# EAGLE board InkTime_2D (EAGLE 9.7.0)
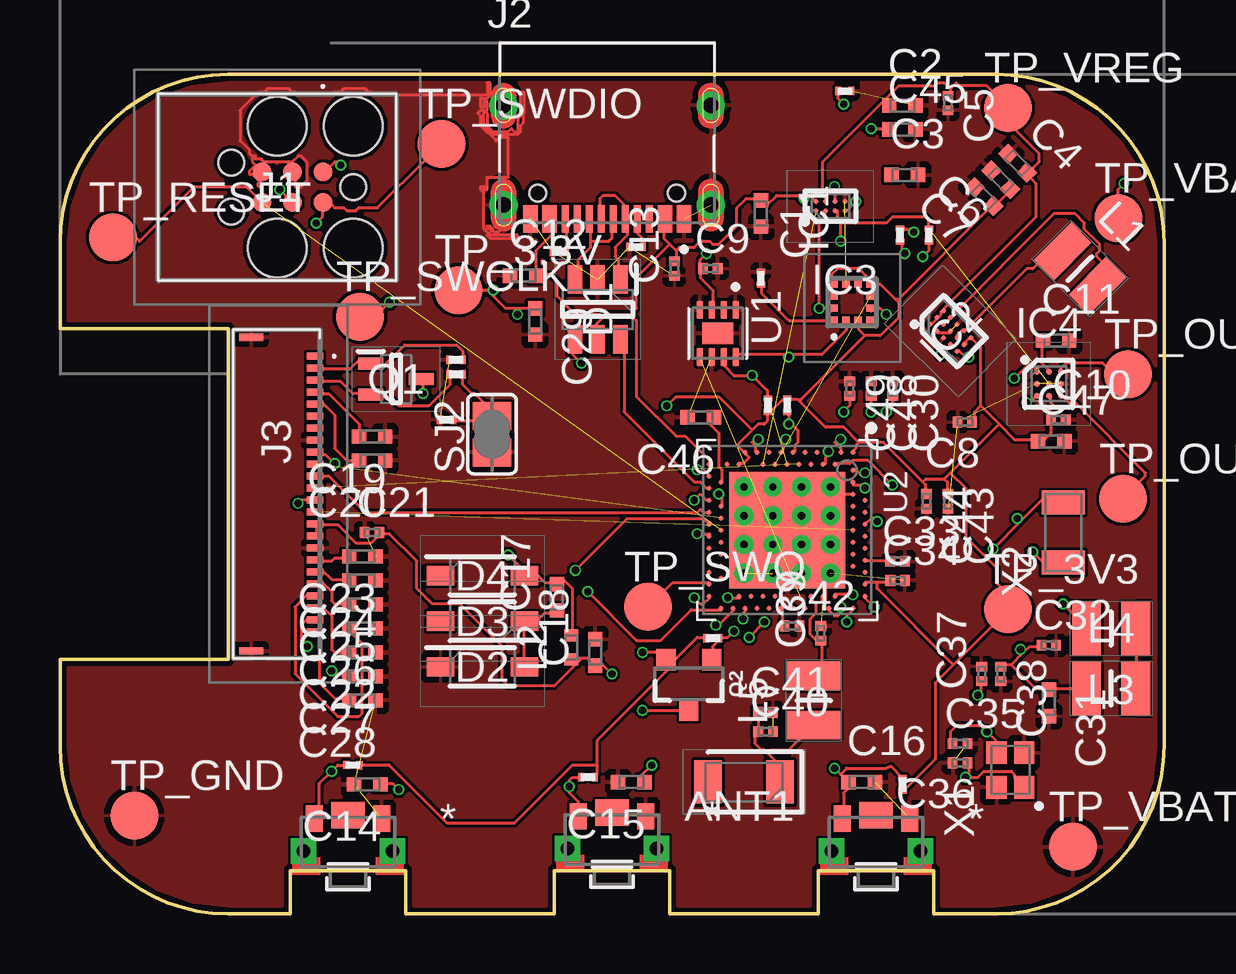
[diagram p0: board, top side]
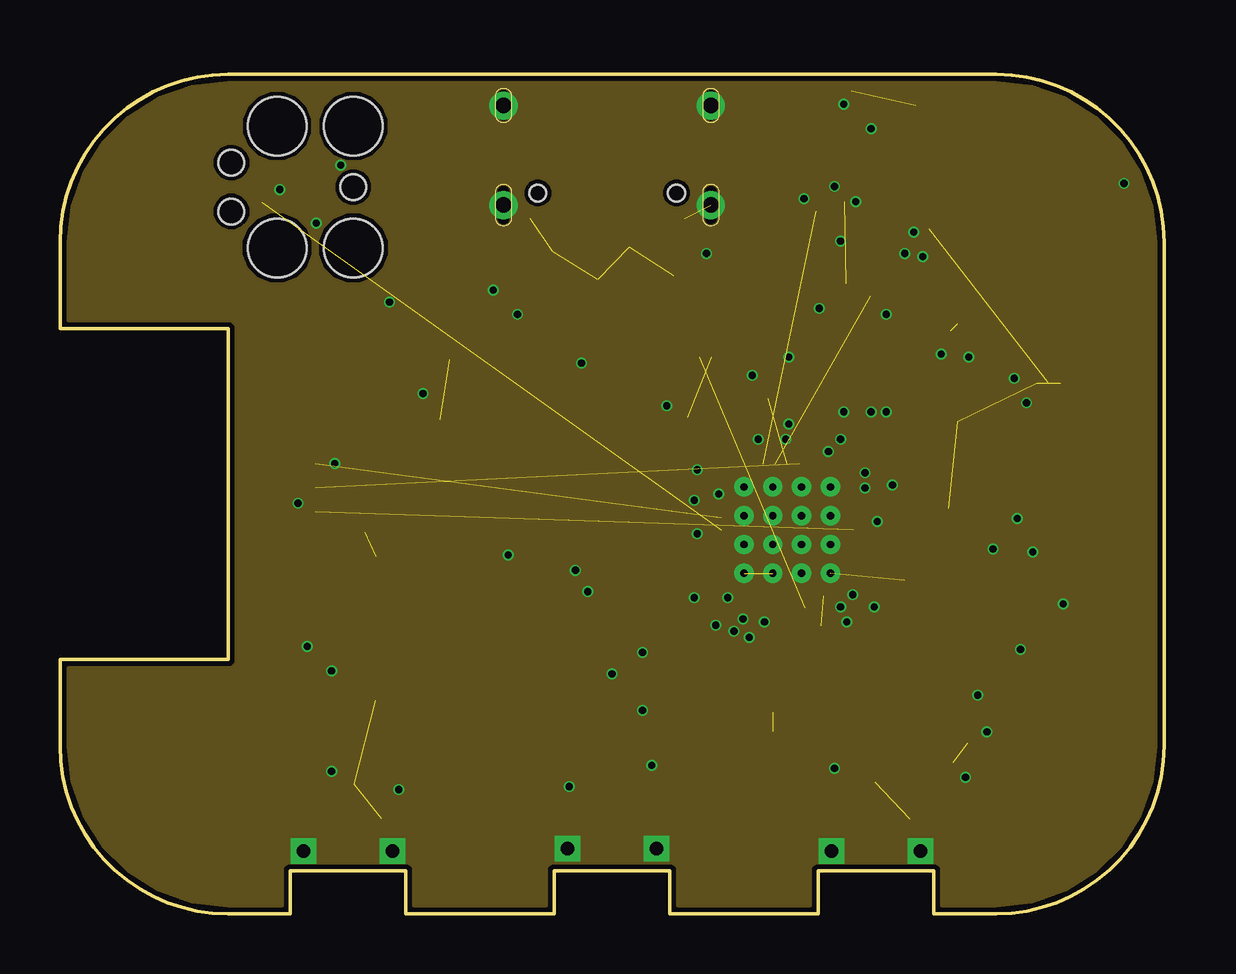
[diagram p1: board, inner layer GND]
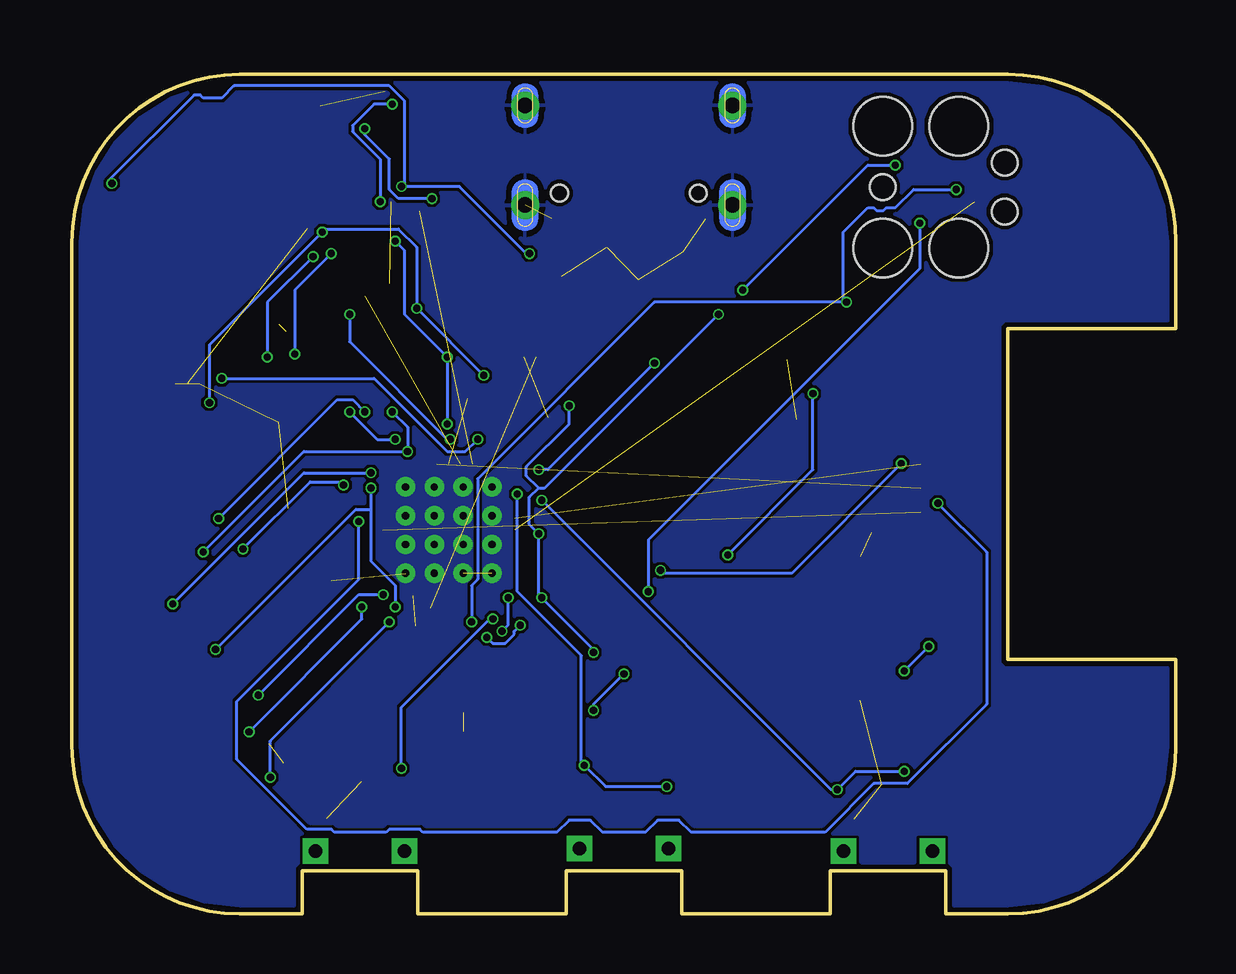
[diagram p2: board, bottom side, seen from below]

Size 46 x 35 mm. Coordinates in mm from the lower left corner, seen from the top.
Outline: 39,0 36.4,0 36.4,1.8 31.6,1.8 31.6,0 25.4,0 25.4,1.8 20.6,1.8 20.6,0 14.4,0 14.4,1.8 9.6,1.8 9.6,0 7,0 arc-90 0,7 0,10.6 7,10.6 7,24.4 0,24.4 0,28 arc-90 7,35 39,35 arc-90 46,28 46,7 arc-90 39,0
Copper layers (1*16): Top / Bottom
Stack-up 2 Layer Stack: Top SilkScreen Epoxy Ink / Top SolderMask SR:Green 0.0254mm Dk 4.3 / Top Surface Finish Lead-Free 0.02mm / Top CuFoil:007 0.035mm / Dielectric-1 Core:084 1.067mm / Bottom CuFoil:007 0.035mm / Bottom Surface Finish Lead-Free 0.02mm / Bottom SolderMask SR:Green 0.0254mm Dk 4.3 / Bottom SilkScreen Epoxy Ink
Design rules: minimum copper width 5mil, minimum drill size 0.2mm, copper clearance wire_polygon to wire_polygon 5mil, copper clearance wire_polygon to pad_smd 5mil, copper clearance wire_polygon to via 5mil, copper clearance pad_smd to pad_smd 5mil, copper clearance pad_smd to via 5mil, copper clearance via to via 5mil, copper clearance smd to pad (same net) 5mil, copper clearance smd to via (same net) 5mil, copper clearance smd to smd (same net) 5mil, dimension clearance 0.2mm, via restrict clearance 0mil, restrict clearance 0mil, drill distance 6mil, keepout clearance 0mil

## Footprints (pad centres in the part's own frame; a part is rotated, then mirrored left to right if it is on the bottom)
2450AT18B100E_ANTC3216X140N = smd 1.15 x 1.8: 1 -1.5,0; 2 1.5,0
NORDIC_NRF_3_RESC0402_N = smd 0.6 x 0.6: 1 -0.55,0; 2 0.55,0
NORDIC_NRF_3_RESC0201_N = smd 0.4 x 0.45: 1 -0.305,0; 2 0.305,0
ESP32_C6_LIBRARY_3_SOT95P280X145-6N = smd 1.2 x 0.6: 1 -1.25,0.95; 2 -1.25,0; 3 -1.25,-0.95; 4 1.25,-0.95; 5 1.25,0; 6 1.25,0.95
ESP32_C6_LIBRARY_5_SOD3716X135N = smd 1.15 x 0.8: 1 -1.75,0; 2 1.75,0
BQ25180YBGR_BGA8C40P2X4_100X155X50 = smd 0.2 x 0.2: A1 -0.2,0.6; A2 0.2,0.6; B1 -0.2,0.2; B2 0.2,0.2; C1 -0.2,-0.2; C2 0.2,-0.2; D1 -0.2,-0.6; D2 0.2,-0.6
RT6160AWSC_BGA15C40P3X5_140X230X60 = smd 0.216 x 0.216: A1 -0.4,0.8; A2 0,0.8; A3 0.4,0.8; B1 -0.4,0.4; B2 0,0.4; B3 0.4,0.4; C1 -0.4,0; C2 0,0; C3 0.4,0; D1 -0.4,-0.4; D2 0,-0.4; D3 0.4,-0.4; E1 -0.4,-0.8; E2 0,-0.8; E3 0.4,-0.8
BMA423_BMA423 = smd 0.3 x 0.35: 1 -0.75,-0.775; 2 -0.25,-0.775; 3 0.25,-0.775; 4 0.75,-0.775; 7 0.75,0.775; 8 0.25,0.775; 9 -0.25,0.775; 10 -0.75,0.775 | smd 0.35 x 0.3: 5 0.775,-0.25; 6 0.775,0.25; 11 -0.775,0.25; 12 -0.775,-0.25
DRV2605YZFR_BGA9C50P3X3_144X144X62 = smd 0.25 x 0.25: A1 -0.5,0.5; A2 0,0.5; A3 0.5,0.5; B1 -0.5,0; B2 0,0; B3 0.5,0; C1 -0.5,-0.5; C2 0,-0.5; C3 0.5,-0.5
TC2030-IDC_TC2030IDC = smd 0.783 x 0.783: 1 -0.953,-0.635; 2 -0.953,0.635; 3 0.317,-0.635; 4 0.317,0.635; 5 1.588,-0.635; 6 1.588,0.635 | hole 2.451: -2.223,-2.54; -2.223,2.54; 0.952,-2.54; 0.952,2.54 | hole 1.067: -2.223,0; 2.857,-1.016; 2.857,1.016
KH-TYPE-C-16P_KINGHELM_KH-TYPE-C-16P = smd 0.6 x 1.15: A1_B12 -3.2,4.725; A4_B9 -2.4,4.725; A9_B4 2.4,4.725; A12_B1 3.2,4.725 | smd 0.3 x 1.15: A5 -1.25,4.725; A6 -0.25,4.725; A7 0.25,4.725; A8 1.25,4.725; B5 1.75,4.725; B6 0.75,4.725; B7 -0.75,4.725; B8 -1.75,4.725 | drill 0.65 pad 1.05: SH1 -4.32,0; SH2 4.32,0; SH3 -4.32,4.15; SH4 4.32,4.15 | hole 0.7: -2.89,3.65; 2.89,3.65
503480-2400_5034802400 = smd 0.3 x 0.7: 1 -5.75,1.525; 2 -5.25,1.525; 3 -4.75,1.525; 4 -4.25,1.525; 5 -3.75,1.525; 6 -3.25,1.525; 7 -2.75,1.525; 8 -2.25,1.525; 9 -1.75,1.525; 10 -1.25,1.525; 11 -0.75,1.525; 12 -0.25,1.525; 13 0.25,1.525; 14 0.75,1.525; 15 1.25,1.525; 16 1.75,1.525; 17 2.25,1.525; 18 2.75,1.525; 19 3.25,1.525; 20 3.75,1.525; 21 4.25,1.525; 22 4.75,1.525; 23 5.25,1.525; 24 5.75,1.525 | smd 0.3 x 1: MP1 -6.54,-1.125; MP2 6.54,-1.125
MLP2016SR47MT0S1_INDC2016X100N = smd 1.2 x 2.2: 1 -1.028,0; 2 1.028,0
NORDIC_NRF_2_RESC0402_L = smd 0.5 x 0.6: 1 -0.5,0; 2 0.5,0
ESP32_C6_LIBRARY_6_SOT65P210X110-3N = smd 1.05 x 0.5: 1 -1.05,0.65; 2 -1.05,-0.65; 3 1.05,0
ESP32_C6_LIBRARY_4_ESP32_C6_LIBRARY_4_ESP32_C6_LIBRARY_4_ESP32_C6_LIBRARY_4_ESP32_WROVER_SPARKFUN-DISCRETESEMI_SOT23-3 = smd 0.8 x 0.9: 1 -0.95,-1; 2 0.95,-1; 3 0,1.1
CPF0201D7K68C1_0201 = smd 0.35 x 0.25: 1 0,0.275; 2 0,-0.275
ESP32_C6_LIBRARY_7_JUMPER_SJ = smd 1.168 x 1.6: 1 -0.762,0; 2 0.762,0
2025-10-22_07-23-44_LIBRARY_SW_EVP-AKE31A_PAN = smd 0.711 x 1.092: 1 -1.4,-0.972; 2 1.4,-0.972 | drill 0.559 pad 0.914 square: 3 -1.848,0.381; 4 1.848,0.381 | smd 1.397 x 1.092: 5 0,-1.124
HECTOR_WATCH_1_TP20R = smd 2 x 2: TP 0,0
ESP32_C6_LIBRARY_SON50P200X200X80-9N = smd 0.76 x 0.27: 1 -0.985,0.75; 2 -0.985,0.25; 3 -0.985,-0.25; 4 -0.985,-0.75; 5 0.985,-0.75; 6 0.985,-0.25; 7 0.985,0.25; 8 0.985,0.75 | smd 0.9 x 1.3: 9 0,0
NORDIC_NRF_4_AQFN50P700X700X85_HS-74N = smd 4.85 x 4.85: P$74 0,0 | drill 0.3 pad 0.6: P$75 -1.8,1.8; P$76 -0.6,1.8; P$77 0.6,1.8; P$78 1.8,1.8; P$79 -1.8,0.6; P$80 -0.6,0.6; P$81 0.6,0.6; P$82 1.8,0.6; P$83 -1.8,-0.6; P$84 -0.6,-0.6; P$85 0.6,-0.6; P$86 1.8,-0.6; P$87 -1.8,-1.8; P$88 -0.6,-1.8; P$89 0.6,-1.8; P$90 1.8,-1.8 | smd 0.2 x 0.2: P$A8 -1.25,3.25; P$A10 -0.75,3.25; P$A12 -0.25,3.25; P$A14 0.25,3.25; P$A16 0.75,3.25; P$A18 1.25,3.25; P$A20 1.75,3.25; P$A22 2.25,3.25; P$A23 2.75,3.25; P$AA24 3.25,-2.25; P$AB2 -2.75,-2.5; P$AC5 -2,-2.75; P$AC9 -1,-2.75; P$AC11 -0.5,-2.75; P$AC13 0,-2.75; P$AC15 0.5,-2.75; P$AC17 1,-2.75; P$AC19 1.5,-2.75; P$AC21 2,-2.75; P$AC24 3.25,-2.75; P$AD2 -2.75,-3.25; P$AD4 -2.25,-3.25; P$AD6 -1.75,-3.25; P$AD8 -1.25,-3.25; P$AD10 -0.75,-3.25; P$AD12 -0.25,-3.25; P$AD14 0.25,-3.25; P$AD16 0.75,-3.25; P$AD18 1.25,-3.25; P$AD20 1.75,-3.25; P$AD22 2.25,-3.25; P$AD23 2.75,-3.25; P$B1 -3.25,2.75; P$B3 -2.5,2.75; P$B5 -2,2.75; P$B7 -1.5,2.75; P$B9 -1,2.75; P$B11 -0.5,2.75; P$B13 0,2.75; P$B15 0.5,2.75; P$B17 1,2.75; P$B19 1.5,2.75; P$B24 3.25,2.75; P$C1 -3.25,2.25; P$D2 -2.75,2; P$D23 2.75,2; P$E24 3.25,1.75; P$F2 -2.75,1.5; P$F23 2.75,1.5; P$G1 -3.25,1.25; P$H2 -2.75,1; P$H23 2.75,1; P$J1 -3.25,0.75; P$J24 3.25,0.75; P$K2 -2.75,0.5; P$L1 -3.25,0.25; P$L24 3.25,0.25; P$M2 -2.75,0; P$N1 -3.25,-0.25; P$N24 3.25,-0.25; P$P2 -2.75,-0.5; P$P23 2.75,-0.5; P$R1 -3.25,-0.75; P$R24 3.25,-0.75; P$T2 -2.75,-1; P$T23 2.75,-1; P$U1 -3.25,-1.25; P$U24 3.25,-1.25; P$V23 2.75,-1.5; P$W1 -3.25,-1.75; P$W24 3.25,-1.75; P$Y2 -2.75,-2; P$Y23 2.75,-2
NORDIC_NRF_BT-XTAL_2016_N = smd 0.95 x 0.85: 1 -0.725,-0.575; 2 0.725,-0.575; 3 0.725,0.575; 4 -0.725,0.575
NORDIC_NRF_1_XTAL_3215_N = smd 1 x 1.8: 1 -1.25,0; 2 1.25,0

## Placement (x,y rotation side)
ANT1  2450AT18B100E  [2450AT18B100E_ANTC3216X140N]  28.5,5.5 180 top
C1  1uF  [NORDIC_NRF_3_RESC0402_N]  29.2,29.2 270 top
C2  10uF  [NORDIC_NRF_3_RESC0402_N]  35.1,33.7 0 top
C3  1uF  [NORDIC_NRF_3_RESC0402_N]  35.2,30.8 0 top
C4  10uF  [NORDIC_NRF_3_RESC0402_N]  39.9,31.3 315 top
C5  0.1uF  [NORDIC_NRF_3_RESC0201_N]  37,33.8 270 top
C6  22uF  [NORDIC_NRF_3_RESC0402_N]  39.2,30.6 135 top
C7  22uF  [NORDIC_NRF_3_RESC0402_N]  38.5,29.9 135 top
C8  0.1uF  [NORDIC_NRF_3_RESC0201_N]  37.7,20.5 180 top
C9  0.1uF  [NORDIC_NRF_3_RESC0201_N]  27.1,26.9 0 top
C10  0.1uF  [NORDIC_NRF_3_RESC0201_N]  41.6,20.6 0 top
C11  1uF  [NORDIC_NRF_3_RESC0402_N]  41.5,23.9 0 top
C12  4.7uF  [NORDIC_NRF_3_RESC0402_N]  19.3,26.6 0 top
C13  0.1uF  [NORDIC_NRF_3_RESC0201_N]  25.6,26.9 90 top
C14  1uF  [NORDIC_NRF_3_RESC0402_N]  12.8,5.4 180 top
C15  1uF  [NORDIC_NRF_3_RESC0402_N]  23.8,5.5 180 top
C16  1uF  [NORDIC_NRF_3_RESC0402_N]  33.4,5.5 0 top
C17  4.7uF/25V  [NORDIC_NRF_3_RESC0402_N]  20.7,13.2 90 top
C18  10uF  [NORDIC_NRF_3_RESC0402_N]  22.3,10.9 90 top
C19  1uF  [NORDIC_NRF_3_RESC0402_N]  13,19.9 180 top
C20  1uF  [NORDIC_NRF_3_RESC0402_N]  13,18.9 180 top
C21  0.1uF  [NORDIC_NRF_3_RESC0201_N]  13,15.9 359.8 top
C22  1uF  [NORDIC_NRF_3_RESC0402_N]  12.6,10.9 180 top
C23  1uF  [NORDIC_NRF_3_RESC0402_N]  12.6,14.9 180 top
C24  1uF  [NORDIC_NRF_3_RESC0402_N]  12.6,13.9 180 top
C25  1uF  [NORDIC_NRF_3_RESC0402_N]  12.6,12.9 180 top
C26  1uF  [NORDIC_NRF_3_RESC0402_N]  12.6,11.9 180 top
C27  1uF  [NORDIC_NRF_3_RESC0402_N]  12.6,9.9 180 top
C28  1uF  [NORDIC_NRF_3_RESC0402_N]  12.6,8.9 180 top
C29  4.7uF  [NORDIC_NRF_3_RESC0402_N]  19.8,24.7 270 top
C30  0.1uF  [NORDIC_NRF_3_RESC0201_N]  34.7,21.9 270 top
C31  1uF  [NORDIC_NRF_3_RESC0402_N]  41.2,8.8 270 top
C32  47nF  [NORDIC_NRF_3_RESC0201_N]  41.2,11.2 0 top
C33  NC  [NORDIC_NRF_3_RESC0201_N]  34.9,14.7 0 top
C34  0.1uF  [NORDIC_NRF_3_RESC0201_N]  34.9,13.9 0 top
C35  12pF  [NORDIC_NRF_3_RESC0201_N]  37.5,7.1 0 top
C36  12pF  [NORDIC_NRF_3_RESC0201_N]  37.5,6.3 180 top
C37  100pF  [NORDIC_NRF_3_RESC0201_N]  38.4,10 90 top
C38  NC  [NORDIC_NRF_3_RESC0201_N]  39.2,10 270 top
C39  1pF  [NORDIC_NRF_3_RESC0201_N]  31.7,11.7 90 top
C40  1pF  [NORDIC_NRF_3_RESC0201_N]  29.4,7.6 0 top
C41  NC  [NORDIC_NRF_3_RESC0201_N]  29.4,8.4 0 top
C42  820pF/NC  [NORDIC_NRF_3_RESC0201_N]  30.5,12 0 top
C43  0.1uF  [NORDIC_NRF_3_RESC0201_N]  37,17.2 270 top
C44  0.1uF  [NORDIC_NRF_3_RESC0201_N]  36.1,17.2 270 top
C45  4.7uF  [NORDIC_NRF_3_RESC0402_N]  35.1,32.7 0 top
C46  4.7uF  [NORDIC_NRF_3_RESC0402_N]  26.7,20.7 180 top
C47  4.7uF  [NORDIC_NRF_3_RESC0402_N]  41.3,19.7 0 top
C48  12pF  [NORDIC_NRF_3_RESC0201_N]  33.8,21.9 270 top
C49  12pF  [NORDIC_NRF_3_RESC0201_N]  32.9,21.9 270 top
D1  USBLC6-2SC6Y  [ESP32_C6_LIBRARY_3_SOT95P280X145-6N]  22.4,25.2 270 top
D2  MBR0530  [ESP32_C6_LIBRARY_5_SOD3716X135N]  17.6,10.3 0 top
D3  MBR0530  [ESP32_C6_LIBRARY_5_SOD3716X135N]  17.6,12.2 180 top
D4  MBR0530  [ESP32_C6_LIBRARY_5_SOD3716X135N]  17.6,14.1 0 top
IC1  BQ25180YBGR  [BQ25180YBGR_BGA8C40P2X4_100X155X50]  32.1,29.5 90 top
IC2  RT6160AWSC  [RT6160AWSC_BGA15C40P3X5_140X230X60]  37.1,24.3 45 top
IC3  BMA423  [BMA423_BMA423]  33,25.5 0 top
IC4  DRV2605YZFR  [DRV2605YZFR_BGA9C50P3X3_144X144X62]  41.2,22.1 0 top
J1  TC2030-IDC  [TC2030-IDC_TC2030IDC]  10,30.3 180 top
J2  KH-TYPE-C-16P_KH-TYPE-C-16P  [KH-TYPE-C-16P_KINGHELM_KH-TYPE-C-16P]  22.8,33.7 180 top
J3  503480-2400  [503480-2400_5034802400]  9.1,17.5 270 top
L1  FTC252012SR47MBCA  [MLP2016SR47MT0S1_INDC2016X100N]  42.5,26.9 135 top
L2  68uH  [NORDIC_NRF_2_RESC0402_L]  21.3,11.1 90 top
L3  10uH  [MLP2016SR47MT0S1_INDC2016X100N]  43.8,11.9 0 top
L4  15uH  [MLP2016SR47MT0S1_INDC2016X100N]  43.8,9.4 180 top
L5  3.9nH  [MLP2016SR47MT0S1_INDC2016X100N]  31.4,8.9 270 top
Q1  SI1308EDL-T1-GE3  [ESP32_C6_LIBRARY_6_SOT65P210X110-3N]  14,22.3 0 top
Q2  20V/4.2A/52mΩ/1.4W  [ESP32_C6_LIBRARY_4_ESP32_C6_LIBRARY_4_ESP32_C6_LIBRARY_4_ESP32_C6_LIBRARY_4_ESP32_WROVER_SPARKFUN-DISCRETESEMI_SOT23-3]  26.2,9.6 180 top
R1  10k  [CPF0201D7K68C1_0201]  32.7,34.3 270 top
R2  0  [CPF0201D7K68C1_0201]  35,28.3 180 top
R3  0  [CPF0201D7K68C1_0201]  36.2,28.3 180 top
R4  3k3  [CPF0201D7K68C1_0201]  29.5,21.2 180 top
R5  3k3  [CPF0201D7K68C1_0201]  30.3,21.2 0 top
R6  0  [CPF0201D7K68C1_0201]  29.2,26.5 180 top
R7  5k1  [CPF0201D7K68C1_0201]  24,27.8 90 top
R8  5k1  [CPF0201D7K68C1_0201]  20.8,27.6 270 top
R9  10k  [CPF0201D7K68C1_0201]  12.2,6.2 88.1 top
R10  10k  [CPF0201D7K68C1_0201]  22,5.7 90 top
R11  10k  [CPF0201D7K68C1_0201]  35.1,5.4 0 top
R12  10k  [CPF0201D7K68C1_0201]  16.5,23.1 90 top
R13  0.47  [CPF0201D7K68C1_0201]  16.5,22.5 270 top
R14  2.2  [CPF0201D7K68C1_0201]  16.1,20.6 90 top
R15  10k  [CPF0201D7K68C1_0201]  27.2,11.5 270 top
SJ2  [ESP32_C6_LIBRARY_7_JUMPER_SJ]  18,20 90 top
SW_DN  2025-10-22_07-23-44_LIBRARY_EVP-AKE31ASW_EVP-AKE31A_PAN  [2025-10-22_07-23-44_LIBRARY_SW_EVP-AKE31A_PAN]  34,3 180 top
SW_ENT  2025-10-22_07-23-44_LIBRARY_EVP-AKE31ASW_EVP-AKE31A_PAN  [2025-10-22_07-23-44_LIBRARY_SW_EVP-AKE31A_PAN]  23,3.1 180 top
SW_UP  2025-10-22_07-23-44_LIBRARY_EVP-AKE31ASW_EVP-AKE31A_PAN  [2025-10-22_07-23-44_LIBRARY_SW_EVP-AKE31A_PAN]  12,3 180 top
TP_3.3V  HECTOR_WATCH_1_TPTP20R  [HECTOR_WATCH_1_TP20R]  16.6,26 0 top
TP_3V3  HECTOR_WATCH_1_TPTP20R  [HECTOR_WATCH_1_TP20R]  39.5,12.7 0 top
TP_GND  HECTOR_WATCH_1_TPTP20R  [HECTOR_WATCH_1_TP20R]  3.1,4.1 0 top
TP_OUT+  HECTOR_WATCH_1_TPTP20R  [HECTOR_WATCH_1_TP20R]  44.5,22.5 0 top
TP_OUT-  HECTOR_WATCH_1_TPTP20R  [HECTOR_WATCH_1_TP20R]  44.3,17.3 0 top
TP_RESET  HECTOR_WATCH_1_TPTP20R  [HECTOR_WATCH_1_TP20R]  2.2,28.2 0 top
TP_SWCLK  HECTOR_WATCH_1_TPTP20R  [HECTOR_WATCH_1_TP20R]  12.5,24.9 0 top
TP_SWDIO  HECTOR_WATCH_1_TPTP20R  [HECTOR_WATCH_1_TP20R]  15.9,32.1 0 top
TP_SWO  HECTOR_WATCH_1_TPTP20R  [HECTOR_WATCH_1_TP20R]  24.5,12.8 0 top
TP_VBAT  HECTOR_WATCH_1_TPTP20R  [HECTOR_WATCH_1_TP20R]  44.1,29 0 top
TP_VBAT_GND  HECTOR_WATCH_1_TPTP20R  [HECTOR_WATCH_1_TP20R]  42.2,2.8 0 top
TP_VREG  HECTOR_WATCH_1_TPTP20R  [HECTOR_WATCH_1_TP20R]  39.5,33.6 0 top
U1  MAX17048G+T10  [ESP32_C6_LIBRARY_SON50P200X200X80-9N]  27.4,24.2 270 top
U2  NRF52840_QF  [NORDIC_NRF_4_AQFN50P700X700X85_HS-74N]  30.3,16 270 top
X1  32Mhz  [NORDIC_NRF_BT-XTAL_2016_N]  39.6,6 90 top
X2  32.768kHz  [NORDIC_NRF_1_XTAL_3215_N]  41.8,15.9 90 top

## Library data of the parts
ANT1 = InkTime_v5; ARROW_PART_NUMBER: 2450AT18B100E; ARROW_PRICE-STOCK: https://www.arrow.com/en/products/2450at18b100e/johanson-dielectrics?utm_currency=USD&region=nac; DESCRIPTION: Antennas 2.45GHz ANTENNA; HEIGHT: 1.4mm; MANUFACTURER_NAME: JOHANSON TECHNOLOGY; MANUFACTURER_PART_NUMBER: 2450AT18B100E; MOUSER_PART_NUMBER: 609-2450AT18B100E; MOUSER_PRICE-STOCK: https://www.mouser.co.uk/ProductDetail/Johanson-Technology/2450AT18B100E?qs=yCnrNFeXz%252Bh5MFsFIXGZGA%3D%3D
C1-C49 L2 R1-R15 SJ2 TP_3.3V TP_3V3 TP_GND TP_OUT+ TP_OUT- TP_RESET TP_SWCLK TP_SWDIO TP_SWO TP_VBAT TP_VBAT_GND TP_VREG U2 X1 X2 = InkTime_v5
D1 = InkTime_v5; AVAILABILITY: In Stock; CHECK_PRICES: https://www.snapeda.com/parts/USBLC6-2SC6Y/STMicroelectronics/view-part/?ref=eda; DESCRIPTION: 17V Clamp 5A (8/20µs) Ipp Tvs Diode Surface Mount SOT-23-6; MF: STMicroelectronics; MP: USBLC6-2SC6Y; PACKAGE: SOT-23-6 STMicroelectronics; PRICE: None; SNAPEDA_LINK: https://www.snapeda.com/parts/USBLC6-2SC6Y/STMicroelectronics/view-part/?ref=snap
D2-D4 = InkTime_v5; AVAILABILITY: In Stock; CHECK_PRICES: https://www.snapeda.com/parts/MBR0530/Onsemi/view-part/?ref=eda; DESCRIPTION: Diode Schottky 30 V 500mA Surface Mount SOD-123; MF: ON Semiconductor; MP: MBR0530; PACKAGE: SOD-123-2 ON Semiconductor; PRICE: None; PURCHASE-URL: https://www.snapeda.com/api/url_track_click_mouser/?unipart_id=179458&manufacturer=ON Semiconductor&part_name=MBR0530&search_term=None; SNAPEDA_LINK: https://www.snapeda.com/parts/MBR0530/Onsemi/view-part/?ref=snap
IC1 = InkTime_v5; ARROW_PART_NUMBER: BQ25180YBGR; ARROW_PRICE-STOCK: https://www.arrow.com/en/products/bq25180ybgr/texas-instruments?utm_currency=USD&region=nac; DESCRIPTION: Charger IC Lithium Ion/Polymer, Lithium Iron Phosphate 8-DSBGA (1.6x1.1); HEIGHT: 0.5mm; MANUFACTURER_NAME: Texas Instruments; MANUFACTURER_PART_NUMBER: BQ25180YBGR; MOUSER_PART_NUMBER: 595-BQ25180YBGR; MOUSER_PRICE-STOCK: https://www.mouser.co.uk/ProductDetail/Texas-Instruments/BQ25180YBGR?qs=doiCPypUmgEWjAK%252BJAX6Tw%3D%3D
IC2 = InkTime_v5; DESCRIPTION: Buck-Boost Regulator Positive Output Step-Up/Step-Down I2C DC-DC Controller IC 15-WL-CSP (BSC) (1.4x2.3); HEIGHT: 0.6mm; MANUFACTURER_NAME: RICHTEK; MANUFACTURER_PART_NUMBER: RT6160AWSC; MOUSER_PART_NUMBER: 835-RT6160AWSC; MOUSER_PRICE-STOCK: https://www.mouser.co.uk/ProductDetail/Richtek/RT6160AWSC?qs=amGC7iS6iy%2FLd9PSoixZXQ%3D%3D
IC3 = InkTime_v5; ARROW_PART_NUMBER: BMA423; ARROW_PRICE-STOCK: https://www.arrow.com/en/products/bma423/bosch; DESCRIPTION: Accelerometers Triaxial low-g 12bit Acceleration Sensor; HEIGHT: 1mm; MANUFACTURER_NAME: BOSCH; MANUFACTURER_PART_NUMBER: BMA423; MOUSER_PART_NUMBER: 262-BMA423; MOUSER_PRICE-STOCK: https://www.mouser.co.uk/ProductDetail/Bosch-Sensortec/BMA423?qs=HXFqYaX1Q2xC%252BSgeGoX3mg%3D%3D
IC4 = InkTime_v5; ARROW_PART_NUMBER: DRV2605YZFR; ARROW_PRICE-STOCK: https://www.arrow.com/en/products/drv2605yzfr/texas-instruments?region=nac; DESCRIPTION: Haptic Driver for ERM/LRA with Built-In Library and Smart Loop Architecture; HEIGHT: 0.625mm; MANUFACTURER_NAME: Texas Instruments; MANUFACTURER_PART_NUMBER: DRV2605YZFR
J1 = InkTime_v5; DESCRIPTION: CABLE ADAPTER 6 POS; HEIGHT: 19mm; MANUFACTURER_NAME: Tag Connect; MANUFACTURER_PART_NUMBER: TC2030-IDC
J2 = InkTime_v5; AVAILABILITY: Not in stock; CHECK_PRICES: https://www.snapeda.com/parts/KH-TYPE-C-16P/Kinghelm/view-part/?ref=eda; MF: kinghelm; MP: KH-TYPE-C-16P; PACKAGE: None; PRICE: None; SNAPEDA_LINK: https://www.snapeda.com/parts/KH-TYPE-C-16P/Kinghelm/view-part/?ref=snap
J3 = InkTime_v5; DESCRIPTION: FFC & FPC Connectors 0.5mm FPC RA SMT Dual Contact 24Ckt; HEIGHT: 1.87mm; MANUFACTURER_NAME: Molex; MANUFACTURER_PART_NUMBER: 503480-2400; MOUSER_PART_NUMBER: 538-503480-2400; MOUSER_PRICE-STOCK: https://www.mouser.co.uk/ProductDetail/Molex/503480-2400?qs=OAhjpuo3Vu7efIoxFh9AOw%3D%3D
L1 L3-L5 = InkTime_v5; DESCRIPTION: SMD / SMT Inductors (Coils), L=0.47?H, L x W x T :; HEIGHT: 1mm; JLCPCB: https://jlcpcb.com/partdetail/6763488-FTC252012SR47MBCA/C5832368; MANUFACTURER_NAME: TDK; MANUFACTURER_PART_NUMBER: FTC252012SR47MBCA
Q1 = InkTime_v5; AVAILABILITY: In Stock; CHECK_PRICES: https://www.snapeda.com/parts/SI1308EDL-T1-GE3/Vishay+Siliconix/view-part/?ref=eda; DESCRIPTION: Si1308EDL-T1-GE3 N-channel MOSFET Transistor, 1.5 A, 30 V, 3-Pin SC-70 | Siliconix / Vishay SI1308EDL-T1-GE3; MF: Vishay Siliconix; MP: SI1308EDL-T1-GE3; PACKAGE: SOT-323 Vishay Semiconductor; PRICE: None; PURCHASE-URL: https://www.snapeda.com/api/url_track_click_mouser/?unipart_id=274603&manufacturer=Vishay Siliconix&part_name=SI1308EDL-T1-GE3&search_term=None; SNAPEDA_LINK: https://www.snapeda.com/parts/SI1308EDL-T1-GE3/Vishay+Siliconix/view-part/?ref=snap
Q2 = InkTime_v5; PROD_ID: TRAN-14388
SW_DN SW_ENT SW_UP = InkTime_v5; COPYRIGHT: Copyright (C) 2025 Ultra Librarian. All rights reserved.; DIGI-KEY_PART_NUMBER_1: P123437TR-ND; DIGI-KEY_PART_NUMBER_2: P123437CT-ND; DIGI-KEY_PART_NUMBER_3: P123437DKR-ND; MANUFACTURER_NAME: Panasonic; MANUFACTURER_PART_NUMBER: EVP-AKE31A
U1 = InkTime_v5; AVAILABILITY: In Stock; CHECK_PRICES: https://www.snapeda.com/parts/MAX17048G+T10/Analog+Devices/view-part/?ref=eda; DESCRIPTION: 3µA 1-Cell/2-Cell Fuel Gauge with ModelGauge; MF: Analog Devices; MP: MAX17048G+T10; PACKAGE: TDFN-8 Maxim; PRICE: None; PURCHASE-URL: https://www.snapeda.com/api/url_track_click_mouser/?unipart_id=329239&manufacturer=Analog Devices&part_name=MAX17048G+T10&search_term=None; SNAPEDA_LINK: https://www.snapeda.com/parts/MAX17048G+T10/Analog+Devices/view-part/?ref=snap

## Nets
3V3: C6.1 C7.1 C8.1 C10.1 C29.1 C34.1 C43.1 C44.1 C47.1 IC2.E2 IC2.E3 IC3.3 IC3.7 IC3.10 IC4.C2 J1.1 Q2.2 R4.1 R5.1 R9.2 R10.2 R11.2 R15.2 TP_3.3V.TP TP_3V3.TP U2.P$A22 U2.P$AD14 U2.P$AD23 U2.P$B1 U2.P$W1 U2.P$Y2
ALERT: U1.5 U2.P$J24
D+: D1.6 U2.P$AD6
D-: D1.4 U2.P$AD4
DN: D1.1 J2.A7 J2.B7
DP: D1.3 J2.A6 J2.B6
EPD_3V3: C18.1 C21.2 J3.15 J3.16 L2.1 Q2.3
EPD_BUSY: J3.9 U2.P$AD12
EPD_CS: J3.12 U2.P$K2
EPD_DC: J3.11 U2.P$AD10
EPD_RST: J3.10 U2.P$AC11
GDR: J3.2 Q1.1 R12.2
GND: C1.2 C2.2 C3.2 C4.1 C5.2 C6.2 C7.2 C8.2 C9.2 C10.2 C11.2 C12.1 C13.1 C14.2 C15.2 C16.2 C18.2 C19.1 C20.1 C21.1 C22.1 C23.1 C24.1 C25.1 C26.1 C27.1 C28.1 C29.2 C30.1 C31.2 C32.2 C33.2 C34.2 C35.2 C36.2 C37.2 C38.2 C39.2 C40.2 C41.2 C42.2 C43.2 C44.2 C45.2 C46.2 C47.2 C48.1 C49.1 D1.2 D2.1 IC1.D2 IC2.B1 IC2.C1 IC2.C2 IC2.C3 IC3.8 IC3.9 IC4.B1 IC4.B3 J1.3 J1.5 J2.A1_B12 J2.A12_B1 J2.SH1 J2.SH2 J2.SH3 J2.SH4 J3.8 J3.17 J3.MP1 J3.MP2 R1.1 R6.2 R7.1 R8.2 R12.1 R14.1 SJ2.1 SW_DN.1 SW_ENT.1 SW_UP.1 TP_GND.TP TP_VBAT_GND.TP U1.1 U1.4 U1.6 U1.9 U2.P$74 U2.P$75 U2.P$76 U2.P$77 U2.P$78 U2.P$79 U2.P$80 U2.P$81 U2.P$82 U2.P$83 U2.P$84 U2.P$85 U2.P$86 U2.P$87 U2.P$88 U2.P$89 U2.P$90 U2.P$B7 U2.P$F23 X1.2 X1.4
HAPTIC_EN: IC4.A1 U2.P$U1
IMU_INT1: IC3.5 U2.P$N1
IMU_INT2: IC3.6 U2.P$P2
LX1: IC2.B2 IC2.B3 L1.1
LX2: IC2.D2 IC2.D3 L1.2
MOSI: J3.14 U2.P$B13
N$1: IC1.D1 R1.2
N$5: IC2.D1 R2.1
N$8: IC2.E1 R3.1
N$20: IC3.1 R6.1
N$27: C11.1 IC4.A2
N$31: J2.A5 R7.2
N$37: C17.1 D2.2 D3.1
N$38: J2.B5 R8.1
N$40: C17.2 D4.2 L2.2 Q1.3
N$48: R13.1 R14.2 SJ2.2
N$50: C19.2 J3.4
N$51: C20.2 J3.5
N$54: C23.2 J3.18
N$55: C24.2 J3.19
N$56: C25.2 J3.20
N$57: C26.2 J3.21
N$58: C22.2 J3.22
N$59: C27.2 J3.23
N$60: C28.2 J3.24
N$63: C30.2 U2.P$C1
N$64: L3.1 U2.P$B3
N$65: L3.2 L4.1
N$66: C31.1 C32.1 C38.1 L4.2 U2.P$B5 U2.P$E24
N$71: C33.1 U2.P$A18
N$73: C36.1 U2.P$B24 X1.1
N$74: C35.1 U2.P$A23 X1.3
N$75: C37.1 U2.P$D23
N$77: C39.1 L5.1 U2.P$H23
N$78: ANT1.1 C40.1 C41.1 L5.2
N$80: C42.1 U2.P$N24
N$94: C46.1 U2.P$AC5
N$103: C48.2 U2.P$D2 X2.2
N$104: C49.2 U2.P$F2 X2.1
OUT+: IC4.A3 TP_OUT+.TP
OUT-: IC4.C3 TP_OUT-.TP
P0.13: C14.1 R9.1 SW_UP.2 U2.P$AD8
P0.14: C15.1 R10.1 SW_ENT.2 U2.P$AC9
P1.01: Q2.1 R15.1 U2.P$Y23
P1.02: C16.1 R11.1 SW_DN.2 U2.P$W24
PMIC_INT: IC1.A1 U2.P$T2
PREVGH: D4.1
PREVGL: D3.2
RESE: J3.3 Q1.2 R13.2
RESET: J1.6 TP_RESET.TP U2.P$AC13
SCK: J3.13 U2.P$A12
SCL: IC1.B1 IC3.12 IC4.C1 R2.2 R4.2 U1.7 U2.P$M2
SDA: IC1.C1 IC3.2 IC4.B2 R3.2 R5.2 U1.8 U2.P$L1
SWCLK: J1.4 TP_SWCLK.TP U2.P$AA24
SWDIO: J1.2 TP_SWDIO.TP U2.P$AC24
SWO: TP_SWO.TP U2.P$AD22
VBAT: C9.1 IC1.C2 TP_VBAT.TP U1.2 U1.3
VBUS: C1.1 C12.2 C13.2 C45.1 D1.5 IC1.A2 J2.A4_B9 J2.A9_B4 U2.P$AD2
VREG: C2.1 C4.2 C5.1 IC1.B2 IC2.A1 IC2.A2 IC2.A3 TP_VREG.TP
VREG1: C3.1

## Tracks (layer width: path | path; a pad name or v marks a point on that pad's centre or on a via)
3V3  (via drill 0.3)
  Top 0.127: 34.05,13.82 34.56,13.82 C34.1 | 34.05,13.82 33.54,13.82 U2.P$A22 | 37.22,10.39 39.51,12.67 TP_3V3.TP 39.38,12.8 39.38,13.44 39,13.82 39,14.45 37.73,15.72 37.73,17.75 37.1,18.39 | 37.22,10.39 36.46,9.63 36.46,6.45 35.13,5.12 R11.2 | 34.05,13.82 34.05,13.56 37.22,10.39 | C6.1 39.64,30.2 39,29.56 C7.1 38.88,29.44 38.75,29.44 34.94,25.63 34.81,25.63 | IC3.10 32.14,26.39 32.14,26.64 32.4,26.9 33.29,26.9 33.8,26.39 IC3.7 33.67,26.26 33.8,26.14 33.92,26.26 34.18,26.26 34.81,25.63 | 33.54,24.1 33.29,24.36 33.29,24.61 IC3.3 | 33.54,24.1 34.18,24.1 34.94,24.87 34.94,25.5 34.81,25.63 | 41.29,20.55 41.16,20.68 41.29,20.8 41.16,20.93 41.41,21.18 41.29,21.31 41.29,21.56 IC4.C2 | 41.29,20.55 41.29,20.04 41.03,19.79 40.78,19.79 C47.1 40.65,19.79 39.76,19.79 39.13,20.42 | 41.29,20.55 C10.1 | IC2.E2 37.73,23.72 37.73,23.85 37.86,23.98 IC2.E3 37.99,23.98 38.37,23.6 38.37,21.18 | 38.37,21.18 38.11,20.93 38.11,20.55 C8.1 | 38.37,21.18 39.13,20.42 | U2.P$Y2 28.33,18.77 28.46,18.77 28.71,19.02 28.59,19.15 U2.P$W1 28.46,19.28 28.21,19.53 28.84,20.17 | 30.37,21.44 30.24,21.31 30.11,21.44 29.6,20.93 R4.1 29.48,20.8 29.48,20.55 29.35,20.42 29.1,20.42 28.84,20.17 | 33.29,19.66 33.16,19.53 33.16,19.41 33.03,19.28 U2.P$B1 | 33.29,19.66 34.3,19.66 35.95,18.01 | 35.95,18.01 36.08,17.88 36.08,17.75 35.95,17.63 36.08,17.5 C44.1 | 36.84,18.14 36.97,18.01 36.97,17.63 C43.1 | 36.84,18.14 36.08,18.14 35.95,18.01 | 30.75,21.44 30.37,21.44 | 30.75,21.44 31.89,20.29 32.65,20.29 33.29,19.66 | 30.37,21.44 R5.1 | 36.84,18.14 37.1,18.39 | 37.1,18.39 39.13,20.42 | 33.54,24.1 30.87,21.44 30.75,21.44 | 19.06,25.25 18.55,25.25 17.92,25.88
  Top 0.127: 19.06,25.25 19.7,25.25 C29.1 | 17.92,25.88 17.79,26.01 16.65,26.01 TP_3.3V.TP | v11.7,31.22 11.57,31.34 11.44,31.34 11.06,30.96 J1.1 | 17.92,25.88 v18.05,26.01 | v26.43,13.18 26.68,12.93 26.81,12.93 27.06,13.18 U2.P$AD23 | v24.27,10.9 24.91,10.9 25.16,10.64 Q2.2 | v26.56,15.85 26.68,15.98 26.81,15.85 27.06,15.85 U2.P$AD14 | 22.36,6.2 22.36,7.21 25.29,10.13 25.29,10.52 Q2.2 | 22.36,6.2 22.36,5.82 R10.2 | 22.36,6.2 21.35,6.2 18.94,3.78 16.14,3.78 13.73,6.2 12.59,6.2 R9.2 | R15.2 26.81,11.53 26.56,11.53 25.67,10.64 25.29,10.64 Q2.2 | v19.06,24.99 19.06,25.25 | 28.84,20.17 27.45,21.56 25.67,21.56 v25.29,21.18
  Bottom 0.127: v11.7,31.22 12.84,31.22 v18.05,26.01 | v24.27,10.9 24.27,11.02 v26.43,13.18 26.56,13.31 v26.56,15.85 26.94,16.23 26.94,17.37 26.56,17.75 | v19.06,24.99 26.3,17.75 26.56,17.75 | v25.29,21.18 25.29,20.42 27.06,18.64 27.06,18.26 26.56,17.75
ALERT  (1 unrouted)
D+
  Top 0.127: U2.P$AD6 27.06,17.75 26.94,17.75 26.68,18.01 26.43,18.01 23.51,20.93 23.51,23.72 23.38,23.85 D1.6
D-  (via drill 0.3)
  Top 0.127: v26.56,18.52 26.81,18.52 27.06,18.26 U2.P$AD4 | v21.73,22.96 21.35,23.34 21.35,23.85 D1.4
  Bottom 0.127: v26.56,18.52 26.18,18.52 v21.73,22.96
DN
  Top 0.127: J2.A7 22.49,29.06 22.49,29.82 22.62,29.95 23.13,29.95 23.51,29.56 23.51,29.06 J2.B7 23.64,28.93 23.64,28.3 23.13,27.79 23.13,27.41 23.25,27.28 23.25,26.52 D1.1
DP
  Top 0.127: 22.11,28.04 22.11,27.79 21.6,27.28 21.6,26.64 21.48,26.52 D1.3 | 22.11,28.04 22.11,28.93 J2.B6 | 22.11,28.04 22.87,28.04 23,28.17 23,28.93 J2.A6
EPD_3V3  (via drill 0.3)
  Top 0.127: 10.68,16.23 11.57,16.23 12.33,15.47 12.97,15.47 13.22,15.72 13.22,15.85 C21.2 13.35,15.85 13.73,15.85 14.87,14.71 14.87,13.56 15.51,12.93 16.65,12.93 18.43,11.15 18.43,9.75 18.68,9.5 20.59,9.5 21.73,10.64 | 10.68,16.23 10.68,15.85 J3.16 | 10.68,16.23 J3.15 | 21.73,10.64 21.98,10.64 22.24,10.39 C18.1 22.36,10.39 22.62,10.39 v23,10.01 | 21.73,10.64 21.35,10.64 L2.1 | v24.27,8.48 26.18,8.48 Q2.3
  Bottom 0.127: v24.27,8.48 24.27,8.74 v23,10.01
EPD_BUSY  (via drill 0.3)
  Top 0.127: v21.48,14.32 23.64,16.48 26.81,16.48 27.06,16.23 U2.P$AD12 | v11.44,18.77 11.06,19.15 10.68,19.15 J3.9
  Bottom 0.127: v21.48,14.32 21.35,14.2 16.02,14.2 v11.44,18.77
EPD_CS  (1 unrouted)
EPD_DC
  Top 0.127: U2.P$AD10 27.06,16.74 26.81,16.74 26.68,16.86 26.56,16.74 12.71,16.74 11.19,18.26 10.68,18.26 J3.11
EPD_RST  (1 unrouted)
GDR
  Top 0.127: R12.2 16.78,23.21 16.78,23.47 16.52,23.72 14.36,23.72 13.47,22.83 12.97,22.83 Q1.1 12.84,22.96 12.71,23.09 12.46,23.09 12.08,22.71 10.68,22.71 J3.2
GND  (22 unrouted)
  Top 0.127: 8.01,31.6 8.01,31.34 8.14,31.22 7.89,30.96 7.89,30.84 8.01,30.84 8.39,30.45 8.39,30.33 8.27,30.33 8.27,30.45 8.39,30.58 8.39,30.84 J1.5 | 8.01,31.6 8.14,31.6 8.14,31.47 8.39,31.47 8.52,31.34 9.66,31.34 9.92,31.6 10.05,31.6 10.3,31.34 10.3,30.58 10.05,30.33 9.79,30.33 9.79,30.84 J1.3 | IC2.C2 37.1,24.23 36.59,24.23 IC2.B1 | U2.P$F23 31.76,13.18 31.76,13.05 31.89,13.05 31.89,14.07 32.02,14.2 U2.P$74 32.14,17.75 | U2.P$B7 32.4,17.5 32.14,17.75 | 32.14,17.75 U2.P$75 | 8.01,31.6 7.89,31.72 7.89,31.85 7.51,32.23 7.51,33.5 8.14,34.14 8.27,34.14 8.27,34.26 8.52,34.26 8.65,34.39 9.54,34.39 9.66,34.26 9.79,34.26 9.92,34.14 11.44,34.14 11.44,34.26 11.7,34.26 11.82,34.39 12.71,34.39 12.84,34.26 12.97,34.26 13.09,34.14 17.79,34.14 17.79,34.64 17.92,34.64 17.92,34.14 17.79,34.01 17.54,34.01 17.54,33.63 17.67,33.63 17.67,33.88 17.79,33.88 17.79,33.5 17.67,33.38 17.67,32.87 18.05,32.49 18.94,32.49 19.06,32.61 19.06,33.12 19.32,33.38 19.32,34.26 19.19,34.26 19.19,33.38 19.32,33.25 19.32,32.99 19.19,32.87 19.19,32.61 19.06,32.49 18.81,32.74 18.68,32.61 18.05,32.61 17.79,32.87 17.79,33.38 17.67,33.5 17.54,33.5 17.41,33.38 17.54,33.25 17.54,32.87 18.17,32.23 18.3,32.36 18.68,32.36 18.68,30.71 17.79,30.71 17.79,30.2 17.67,30.2 17.67,30.33 17.54,30.33 17.54,30.2 17.67,30.07 17.67,28.55 17.92,28.3 19.06,28.3 19.06,28.17 17.92,28.17 17.79,28.3 18.05,28.55 17.92,28.68 17.79,28.68 17.79,28.55 17.92,28.55 18.05,28.42 18.3,28.42 18.3,29.18 18.55,29.44 J2.SH4
  pour GND: 0,10.6 0,28.1 arc-90 6.9,35 39.3,35 arc-90 46,28.3 46,-0.4 -0.1,-0.4 -0.1,10.6
  pour Top: -1,37.6 43.1,37.6 47.1,33.6 47.1,2.4 41.8,-2.9 1.2,-2.9 -1,-0.7
  pour Bottom: -1,37.6 43.1,37.6 47.1,33.6 47.2,33.6 47.2,-0.9 44.8,-3.3 -2.6,-3.3 -2.8,-3.5 -2.8,35.8
  pour Top: 4.7,34.2 40.2,34.2 40.4,34.4 41.2,34.4 44.9,30.7 44.9,4.4 41.4,0.9 37.7,0.9 37.2,1.4 37.2,4.1 2.4,4.1 2.2,3.9 2.2,8 0.8,9.4 8.4,9.4 8.7,9.7 8.7,24.5 8,25.2 0.8,25.2 0.6,25 0.6,30.1
  pour GND: 5.4,34.2 39.9,34.2 40.1,34.4 44.5,30 44.8,30 44.8,4.5 41.2,0.9 37.3,0.9 37.3,3.4 37,3.1 2.2,3.1 1,4.3 1,9.6 1.3,9.9 8.2,9.9 8.2,25 7.8,25.4 1.2,25.4 0.8,25 0.8,29.6
  pour Bottom: 5.4,34.3 40.4,34.3 45,29.7 45,5.5 40.4,0.9 37.4,0.9 37,1.3 37,3.6 9,3.6 8.8,3.8 8.8,0.7 8.6,0.5 0.9,8.2 0.9,9.9 1,9.8 8.1,9.8 8.1,25.2 7.9,25.4 1.1,25.4 0.9,25.2 0.9,29.8
HAPTIC_EN  (via drill 0.3)
  Top 0.127: v29.1,19.79 28.97,19.79 28.84,19.66 28.97,19.53 28.97,19.28 U2.P$U1 | v39.76,22.33 40.4,22.96 40.65,22.71 IC4.A1
  Bottom 0.127: v29.1,19.79 29.6,19.28 30.37,19.28 33.41,22.33 v39.76,22.33
IMU_INT1  (via drill 0.3)
  Top 0.127: v30.24,19.79 30.24,19.66 30.11,19.53 30.11,19.28 U2.P$N1 | v34.43,24.99 34.18,25.25 33.92,25.25 33.8,25.12 33.67,25.25 IC3.5
  Bottom 0.127: v30.24,19.79 30.37,19.79 34.43,23.85 v34.43,24.99
IMU_INT2  (1 unrouted)
LX1
  Top 0.127: IC2.B3 36.84,24.61 IC2.B2 | IC2.B3 41.41,29.18 42.3,29.18 42.69,28.8 42.69,28.55 43.32,27.91 43.32,27.66 43.19,27.53 43.19,27.41 43.45,27.15 43.45,26.39 43.32,26.26 L1.1 | IC2.B3
LX2
  Top 0.127: IC2.D2 37.35,24.1 37.61,24.36 IC2.D3 37.73,24.36 40.27,26.9 40.53,26.9 41.16,27.53 41.67,27.53 L1.2
MOSI  (1 unrouted)
N$1  (via drill 0.3)
  Top 0.127: v33.16,29.69 32.78,29.31 IC1.D1 | v32.65,33.76 32.4,34.01 32.4,34.26 R1.2
  Bottom 0.127: v33.16,29.69 33.16,31.47 34.3,32.61 34.3,32.87 33.41,33.76 v32.65,33.76
N$5  (via drill 0.3)
  Top 0.127: v36.72,23.34 IC2.D1 | v35.19,27.53 35.06,27.66 35.06,27.91 R2.1
  Bottom 0.127: v36.72,23.34 36.72,26.01 v35.19,27.53
N$8  (via drill 0.3)
  Top 0.127: v37.86,23.21 37.73,23.21 37.48,23.47 IC2.E1 | v35.95,27.41 36.21,27.66 36.21,27.91 R3.1
  Bottom 0.127: v37.86,23.21 37.86,25.5 v35.95,27.41
N$20
  Top 0.127: IC3.1 32.14,24.74 30.37,24.74 29.22,25.88 29.22,26.14 R6.1
N$27
  Top 0.127: IC4.A2 41.16,22.71 40.91,22.96 40.91,23.85 C11.1
N$31
  Top 0.127: R7.2 24.27,27.91 24.27,28.17 24.02,28.42 24.02,28.93 J2.A5
N$37
  Top 0.127: C17.1 20.59,12.55 20.21,12.55 19.95,12.29 19.44,12.29 D3.1 19.32,12.17 19.32,10.39 D2.2
N$38
  Top 0.127: R8.1 21.09,27.66 21.09,28.93 J2.B5
N$40  (via drill 0.3)
  Top 0.127: L2.2 21.35,11.66 21.35,13.56 20.97,13.94 20.84,13.94 20.71,13.82 C17.2 20.59,13.82 20.21,13.82 19.95,14.07 19.44,14.07 D4.2 19.44,14.2 v18.68,14.96 | v15.13,21.69 15.13,22.2 Q1.3
  Bottom 0.127: v15.13,21.69 15.13,18.52 v18.68,14.96
N$48
  Top 0.127: R14.2 16.4,20.55 17.79,20.55 17.92,20.68 SJ2.2 17.92,20.8 17.92,21.06 17.29,21.69 17.16,21.69 16.78,22.07 16.78,22.45 R13.1
N$50
  Top 0.127: C19.2 12.46,19.91 12.46,20.42 11.19,21.69 10.68,21.69 J3.4
N$51
  Top 0.127: C20.2 12.33,18.9 11.95,18.9 11.44,19.41 11.44,20.8 10.94,21.31 10.68,21.31 J3.5
N$54
  Top 0.127: C23.2 11.95,14.83 11.44,14.83 11.32,14.71 10.68,14.71 J3.18
N$55
  Top 0.127: C24.2 11.95,13.94 11.32,13.94 10.94,14.32 10.68,14.32 J3.19
N$56
  Top 0.127: C25.2 11.95,12.93 11.44,12.93 11.32,13.05 11.32,13.44 10.94,13.82 10.68,13.82 J3.20
N$57
  Top 0.127: C26.2 12.08,11.79 12.59,11.28 12.59,8.36 12.46,8.23 11.57,8.23 9.79,10.01 9.79,12.8 10.3,13.31 10.55,13.31 J3.21
N$58
  Top 0.127: C22.2 11.95,10.9 11.44,10.9 11.32,11.02 11.32,12.42 10.94,12.8 10.68,12.8 J3.22
N$59  (via drill 0.3)
  Top 0.127: v11.32,10.13 11.44,10.01 11.95,10.01 C27.2 | v10.3,11.15 10.05,11.4 10.05,12.04 10.3,12.29 10.55,12.29 J3.23
  Bottom 0.127: v10.3,11.15 v11.32,10.13
N$60
  Top 0.127: C28.2 11.95,8.99 11.44,8.99 10.81,9.63 10.81,11.53 10.68,11.66 J3.24
N$63  (via drill 0.3)
  Top 0.127: v32.52,19.79 32.4,19.79 32.27,19.66 32.52,19.41 32.52,19.28 U2.P$C1 | v34.43,20.93 34.68,21.18 34.68,21.44 34.56,21.56 34.68,21.69 C30.2
  Bottom 0.127: v32.52,19.79 33.29,19.79 v34.43,20.93
N$64  (via drill 0.3)
  Top 0.127: v33.54,18.39 33.41,18.26 33.16,18.52 33.03,18.52 U2.P$B3 | v41.8,12.93 42.81,11.91 L3.1
  Bottom 0.127: v33.54,18.39 36.34,18.39 v41.8,12.93
N$65
  Top 0.127: L4.1 44.84,9.5 44.84,11.79 L3.2
N$66  (via drill 0.3)
  Top 0.127: v32.52,12.8 32.52,12.55 32.4,12.42 32.27,12.42 32.02,12.67 U2.P$E24 | v33.54,17.75 33.41,17.88 33.03,17.88 33.03,18.01 U2.P$B5 | 39.64,10.39 39.26,10.39 C38.1 | 39.64,10.39 40.65,9.37 41.16,9.37 C31.1 41.29,9.37 42.69,9.37 L4.2 | 39.64,10.39 40.14,10.9 | 40.14,10.9 40.4,11.15 40.78,11.15 C32.1 | 40.14,10.9 v40.02,11.02
  Bottom 0.127: v32.52,12.8 32.52,13.69 33.54,14.71 33.54,16.86 | v33.54,17.75 33.54,16.86 | 33.54,16.86 34.18,16.86 v40.02,11.02
N$71
  Top 0.127: U2.P$A18 33.54,14.71 34.43,14.71 34.56,14.83 34.68,14.71 C33.1
N$73  (via drill 0.3)
  Top 0.127: v32.78,12.17 32.78,12.42 33.03,12.67 U2.P$B24 | 37.86,5.82 37.86,6.2 C36.1 | 37.86,5.82 37.99,5.69 38.24,5.69 38.49,5.94 39.64,5.94 39.76,5.82 39.76,5.69 40.14,5.31 X1.1 | 37.86,5.82 v37.73,5.69
  Bottom 0.127: v32.78,12.17 37.73,7.21 v37.73,5.69
N$74  (via drill 0.3)
  Top 0.127: v33.92,12.8 33.54,13.18 U2.P$A23 | X1.3 39,6.83 39,7.21 v38.62,7.59 38.37,7.85 37.35,7.85 37.1,7.59 37.1,7.21 C35.1
  Bottom 0.127: v33.92,12.8 33.92,12.29 v38.62,7.59
N$75  (via drill 0.3)
  Top 0.127: v33.03,13.31 32.27,13.31 U2.P$D23 | v38.24,9.12 38.37,9.24 38.37,9.5 38.24,9.63 38.37,9.75 C37.1
  Bottom 0.127: v33.03,13.31 34.05,13.31 v38.24,9.12
N$77
  Top 0.127: U2.P$H23 31.26,13.18 31.51,12.93 31.51,12.55 31.26,12.29 31.26,11.66 31.51,11.4 31.64,11.53 31.76,11.4 C39.1 31.76,11.28 31.76,10.26 31.51,10.01 L5.1
N$78
  Top 0.127: C41.1 29.1,8.36 29.1,7.72 C40.1 28.97,7.59 28.97,7.09 29.22,6.83 29.35,6.83 29.48,6.71 | 29.48,6.71 29.98,6.2 29.98,5.56 ANT1.1 | 29.48,6.71 29.6,6.83 30.37,6.83 31.38,7.85 L5.2
N$80
  Top 0.127: U2.P$N24 30.11,12.67 30.11,12.04 C42.1
N$94
  Top 0.127: U2.P$AC5 27.57,18.01 27.57,18.52 27.45,18.64 27.45,20.04 27.06,20.42 27.06,20.55 27.19,20.68 C46.1
N$103  (via drill 0.3)
  Top 0.127: v34.68,17.88 33.67,18.9 33.03,18.9 32.91,18.77 32.4,18.77 U2.P$D2 | 40.02,16.36 40.91,17.25 41.8,17.25 X2.2 | 40.02,16.36 v38.88,15.21 | v33.8,20.93 33.8,21.56 C48.2 | 40.02,16.36 v39.89,16.48
  Bottom 0.127: v34.68,17.88 34.81,18.01 36.08,18.01 v38.88,15.21 | v33.8,20.93 34.3,21.44 34.94,21.44 v39.89,16.48
N$104  (via drill 0.3)
  Top 0.127: v32.02,19.28 32.02,19.15 31.89,19.02 31.89,18.77 U2.P$F2 | v32.65,20.93 32.91,21.18 32.91,21.44 33.03,21.56 32.91,21.69 C49.2 | v40.53,15.09 40.91,14.71 41.8,14.71 X2.1
  Bottom 0.127: v32.65,20.93 32.02,20.29 v32.02,19.28 36.34,19.28 v40.53,15.09
OUT+
  Top 0.127: IC4.A3 41.67,22.71 41.92,22.96 43.45,22.96 43.83,22.58 44.46,22.58 TP_OUT+.TP
OUT-
  Top 0.127: IC4.C3 41.8,21.56 42.05,21.31 42.3,21.31 45.23,18.39 45.23,18.26 44.34,17.37 TP_OUT-.TP
P0.13  (via drill 0.3)
  Top 0.127: R9.1 11.82,6.2 11.57,6.2 v11.32,5.94 10.81,5.44 10.81,4.16 10.68,4.04 SW_UP.2 | v26.43,17.25 26.68,17.5 26.94,17.25 27.06,17.25 U2.P$AD8 | v14.11,5.18 13.86,5.44 13.6,5.44 13.47,5.56 13.35,5.44 C14.1
  Bottom 0.127: v26.43,17.25 14.36,5.18 v14.11,5.18 13.35,5.94 v11.32,5.94
P0.14  (via drill 0.3)
  Top 0.127: R10.1 21.6,5.69 21.35,5.69 21.22,5.56 v21.22,5.31 21.22,5.05 21.6,4.67 21.6,4.16 SW_ENT.2 | v27.45,17.5 27.57,17.37 27.57,16.99 U2.P$AC9 | v24.65,6.2 24.27,5.82 24.27,5.56 C15.1
  Bottom 0.127: v27.45,17.5 27.45,13.44 24.78,10.77 24.78,6.32 v24.65,6.2 23.76,5.31 v21.22,5.31
P1.01  (via drill 0.3)
  Top 0.127: v27.83,13.18 28.33,13.18 U2.P$Y23 | v28.08,11.79 27.83,11.53 27.57,11.53 R15.1 27.45,11.4 27.19,11.15 27.19,10.64 Q2.1
  Bottom 0.127: v27.83,13.18 27.83,12.04 v28.08,11.79
P1.02  (via drill 0.3)
  Top 0.127: v28.46,12.29 28.33,12.42 28.59,12.67 U2.P$W24 | 32.52,5.82 32.78,5.56 32.78,5.22 | 32.52,5.82 v32.27,6.07 | 32.78,5.22 C16.1 32.78,5.43 | 32.52,5.82 32.78,6.07 34.43,6.07 34.63,6.14 R11.1 | 32.78,5.22 32.78,5.18 32.65,5.05 32.65,4.04 SW_DN.2
  Bottom 0.127: v28.46,12.29 28.59,12.29 32.27,8.61 v32.27,6.07
PMIC_INT  (1 unrouted)
RESE
  Top 0.127: R13.2 16.27,22.45 16.27,22.07 15.38,21.18 14.11,21.18 13.73,21.56 12.97,21.56 Q1.2 12.84,21.69 12.21,21.69 11.7,22.2 10.68,22.2 J3.3
RESET  (1 unrouted)
  Top 0.127: J1.6 8.39,29.69 7.76,30.33 5.6,30.33 3.32,28.04 3.19,28.17 2.3,28.17 TP_RESET.TP
SCK  (via drill 0.3)
  Top 0.127: v34.05,16.36 33.92,16.48 33.8,16.48 33.54,16.23 U2.P$A12 | v9.92,17.12 10.05,17.25 10.55,17.25 J3.13
  Bottom 0.127: v34.05,16.36 34.05,13.94 39.13,8.86 39.13,6.45 36.21,3.53 35.19,3.53 35.06,3.4 32.91,3.4 32.78,3.53 31.51,3.53 31.38,3.4 25.79,3.4 25.29,3.91 24.4,3.91 23.89,3.4 22.11,3.4 21.6,3.91 20.71,3.91 20.21,3.4 14.62,3.4 12.59,5.44 11.19,5.44 7.89,8.74 7.89,15.09 v9.92,17.12
SCL  (via drill 0.3)  (1 unrouted)
  Top 0.127: R4.2 29.48,21.56 29.48,21.82 v28.84,22.45 28.08,22.45 27.7,22.83 27.7,23.21 U1.7 | 31.64,25.37 31.64,28.8 31.89,29.06 IC1.B1 | 31.64,25.37 31.76,25.25 32.02,25.25 32.14,25.12 32.27,25.25 IC3.12 | 31.64,25.37 v31.64,25.25 | v40.27,21.31 40.4,21.31 40.65,21.56 IC4.C1 | v35.57,28.42 35.45,28.55 35.19,28.55 35.06,28.42 34.94,28.55 R2.2
  Bottom 0.127: v28.84,22.45 v31.64,25.25 31.64,27.79 32.4,28.55 35.45,28.55 v35.57,28.42 40.27,23.72 v40.27,21.31
SDA  (via drill 0.3)  (1 unrouted)
  Top 0.127: 32.52,28.8 32.4,28.93 32.4,29.31 IC1.C1 | 32.52,28.8 34.43,28.8 34.68,29.06 36.08,29.06 36.21,28.93 36.21,28.68 R3.2 | 30.49,20.42 30.37,20.55 30.37,20.8 R5.2 | 30.49,20.42 30.75,20.17 30.75,19.66 30.62,19.53 30.62,19.28 U2.P$L1 | 30.37,23.34 28.21,23.34 28.08,23.21 U1.8 | 30.37,23.34 31.76,23.34 32.78,24.36 32.78,24.61 IC3.2 | v30.37,20.42 30.49,20.42 | 30.37,23.34 v30.37,23.21 | v32.52,28.04 32.52,28.8
  Bottom 0.127: v30.37,20.42 v30.37,23.21 32.14,24.99 32.14,27.66 v32.52,28.04
SWCLK  (via drill 0.3)
  Top 0.127: v27.32,12.04 27.45,12.04 28.08,12.67 U2.P$AA24 | v29.35,12.17 v28.71,11.53 | v13.73,25.5 13.22,24.99 12.59,24.99 TP_SWCLK.TP | v9.16,30.2 9.66,29.69 J1.4
  Bottom 0.127: v27.32,12.04 27.57,11.79 27.57,11.66 27.95,11.28 28.46,11.28 v28.71,11.53 | v29.35,12.17 29.35,13.69 29.1,13.94 29.1,18.14 21.73,25.5 13.86,25.5 | v9.16,30.2 10.94,30.2 11.7,29.44 12.08,29.44 12.21,29.31 12.46,29.31 12.59,29.44 12.84,29.44 13.86,28.42 13.86,25.5 | 13.86,25.5 v13.73,25.5
SWDIO  (via drill 0.3)
  Top 0.127: v21.98,13.44 24.02,11.4 25.03,11.4 26.3,12.67 27.57,12.67 U2.P$AC24 | v10.68,28.8 10.94,29.06 10.94,29.56 J1.2 11.06,29.56 11.32,29.56 11.44,29.44 11.82,29.44 11.95,29.31 12.33,29.31 12.46,29.44 13.22,29.44 15.25,31.47 15.38,31.47 15.89,31.98 TP_SWDIO.TP
  Bottom 0.127: v21.98,13.44 21.98,15.6 10.68,26.9 v10.68,28.8
SWO
  Top 0.127: U2.P$AD22 27.06,13.82 25.54,13.82 24.52,12.8 TP_SWO.TP
VBAT  (via drill 0.3)
  Top 0.127: 27.19,25.25 27.57,25.25 U1.2 | v32.27,30.33 32.14,30.2 32.14,30.07 32.27,29.95 32.27,29.69 IC1.C2 | v26.94,27.53 26.68,27.28 26.68,27.02 C9.1 26.68,26.9 26.68,26.52 27.19,26.01 27.19,25.25 | 27.19,25.25 U1.3 | v44.34,30.45 44.08,30.2 44.08,29.06 TP_VBAT.TP
  Bottom 0.127: 32.14,30.33 29.86,30.33 27.06,27.53 v26.94,27.53 | v44.34,30.45 44.46,30.58 40.91,34.14 40.65,34.14 40.53,34.01 39.76,34.01 39.26,34.52 32.78,34.52 32.14,33.88 32.14,30.33 | 32.14,30.33 v32.27,30.33
VBUS  (via drill 0.3)
  Top 0.127: 31,29.95 29.86,29.95 29.48,29.56 29.35,29.56 29.22,29.69 C1.1 29.1,29.82 28.59,29.82 28.21,29.44 28.21,28.68 27.45,27.91 27.19,27.91 27.06,28.04 26.68,28.04 26.43,27.79 25.79,27.79 25.67,27.66 | 31,29.95 31.26,29.95 IC1.A2 | v33.8,32.74 34.43,32.74 C45.1 | 31,29.95 v31,29.82 | J2.A9_B4 20.46,28.93 20.59,28.8 20.59,28.42 19.82,27.66 19.82,26.64 C12.2 19.95,26.64 20.46,26.64 20.71,26.39 20.71,25.76 21.48,24.99 22.49,24.99 22.62,24.87 | 25.67,27.66 25.67,27.28 C13.2 | 25.41,27.91 25.16,28.17 25.16,28.93 J2.A4_B9 | 25.41,27.91 25.67,27.66 | 23.76,24.99 24.02,24.74 24.02,21.56 25.67,19.91 26.05,19.91 27.06,18.9 27.06,18.77 U2.P$AD2 | 23.76,24.99 22.75,24.99 22.62,24.87 | 22.62,24.87 22.36,24.61 22.36,23.98 D1.5 | 25.41,27.91 24.02,26.52 24.02,25.25 23.76,24.99
  Bottom 0.127: v33.8,32.74 33.8,32.49 32.78,31.47 32.78,30.2 32.4,29.82 v31,29.82
VREG
  Top 0.127: 36.59,24.87 36.34,24.61 IC2.A1 | 36.59,24.87 36.72,24.99 36.72,25.12 IC2.A3 36.84,25.25 40.65,29.06 40.65,30.45 40.27,30.84 C4.2 40.4,30.96 40.78,31.34 40.78,31.72 39.51,32.99 39.51,33.5 TP_VREG.TP 39.51,33.63 38.62,34.52 37.48,34.52 37.35,34.64 37.1,34.39 | 36.59,24.87 IC2.A2 | 37.1,34.39 37.1,34.14 C5.1 | 34.56,33.76 34.43,33.88 34.3,33.88 31.76,31.34 31.76,30.07 31.89,29.95 IC1.B2 | 37.1,34.39 36.84,34.64 36.59,34.64 36.46,34.52 34.94,34.52 34.43,34.01 34.56,33.88 34.56,33.76 | 34.56,33.76 C2.1